# Altium PCB PCB1.PcbDoc
Units mm, origin at the board's own origin, x right, y up, seen from the top; angles counter-clockwise.
Board outline 23.37 x 32.64 mm, 2 copper layers (Top Layer, Bottom Layer); 11 components, 7 nets, 24 pads, 0 vias.
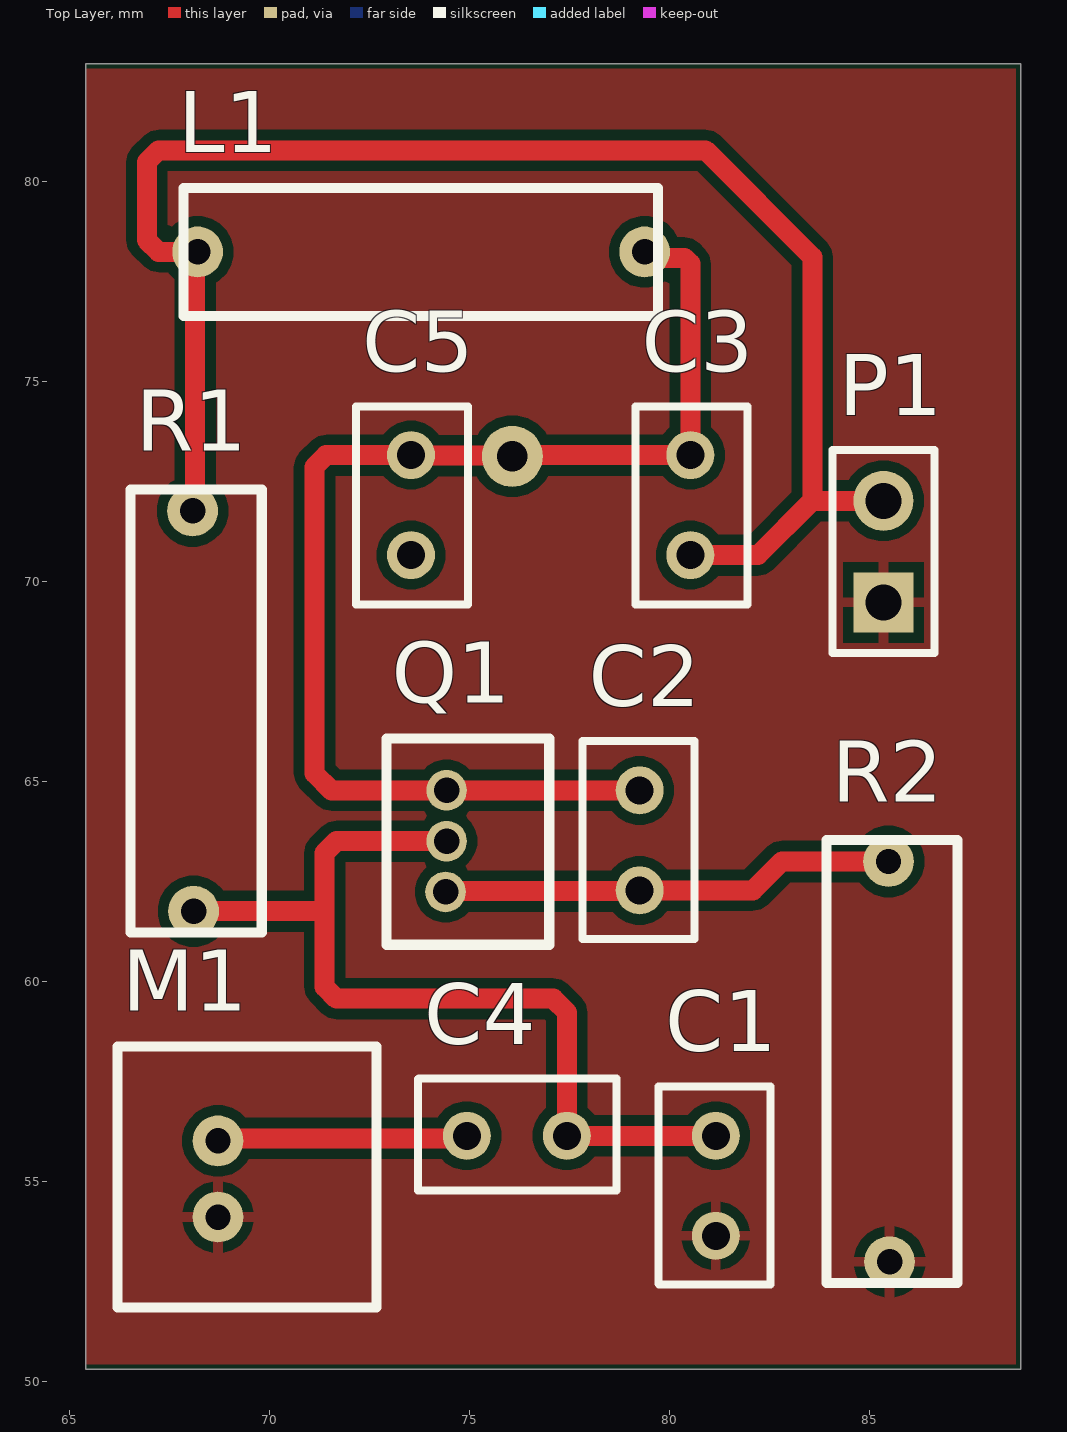
[diagram p0: Top Layer view]
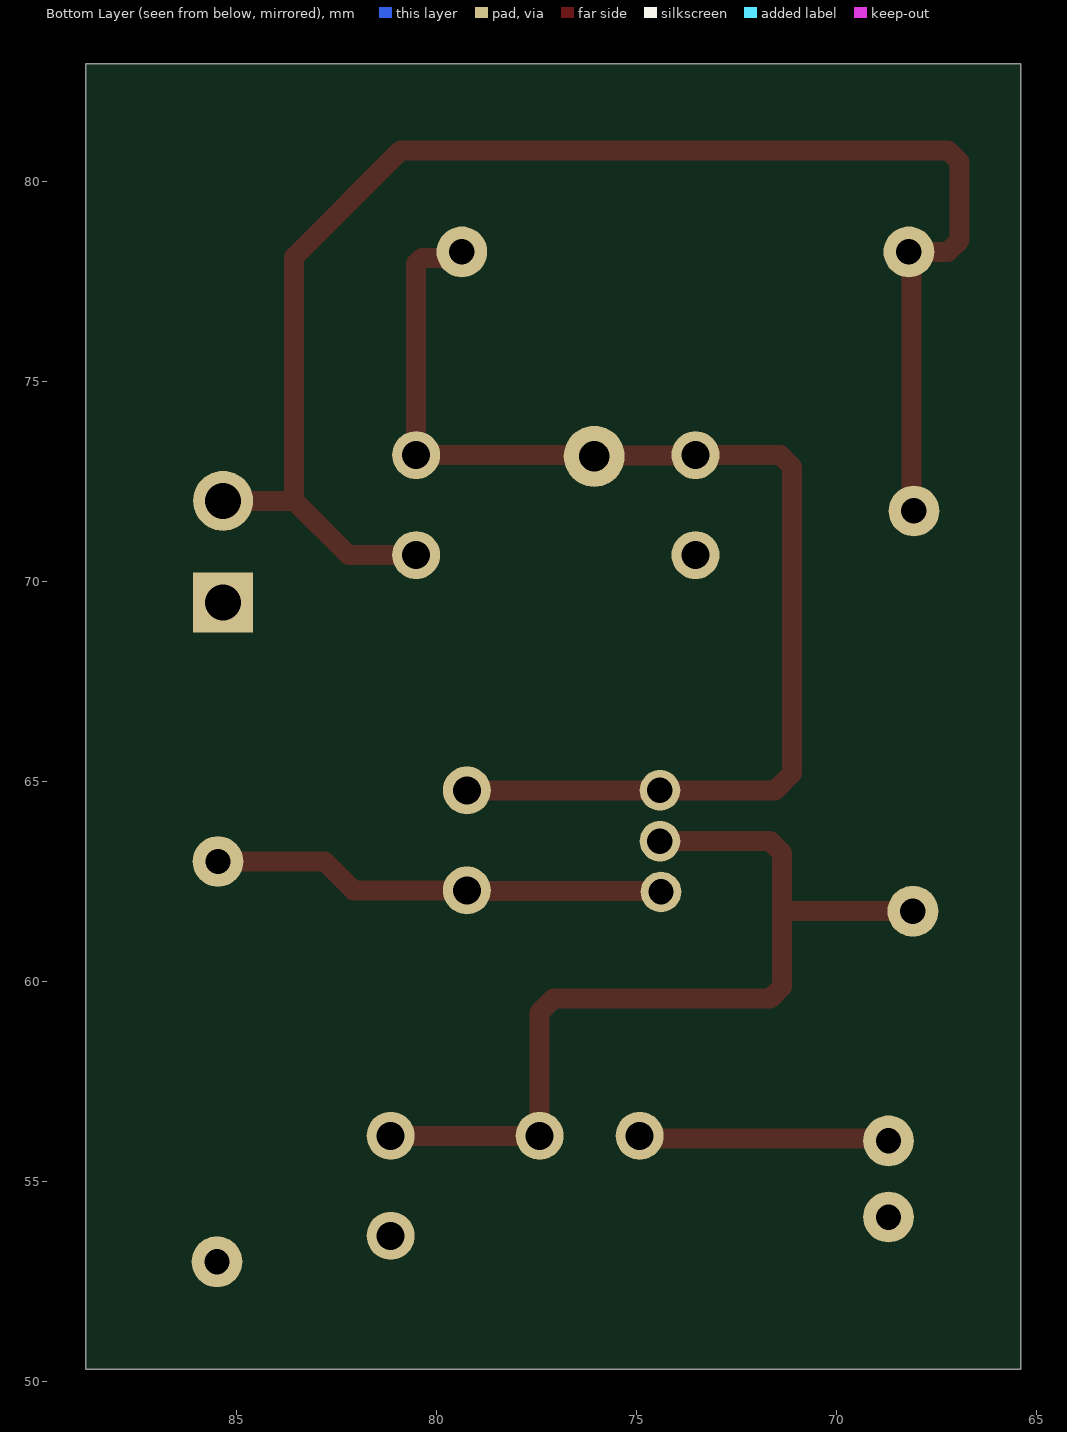
[diagram p1: Bottom Layer view, seen from below]
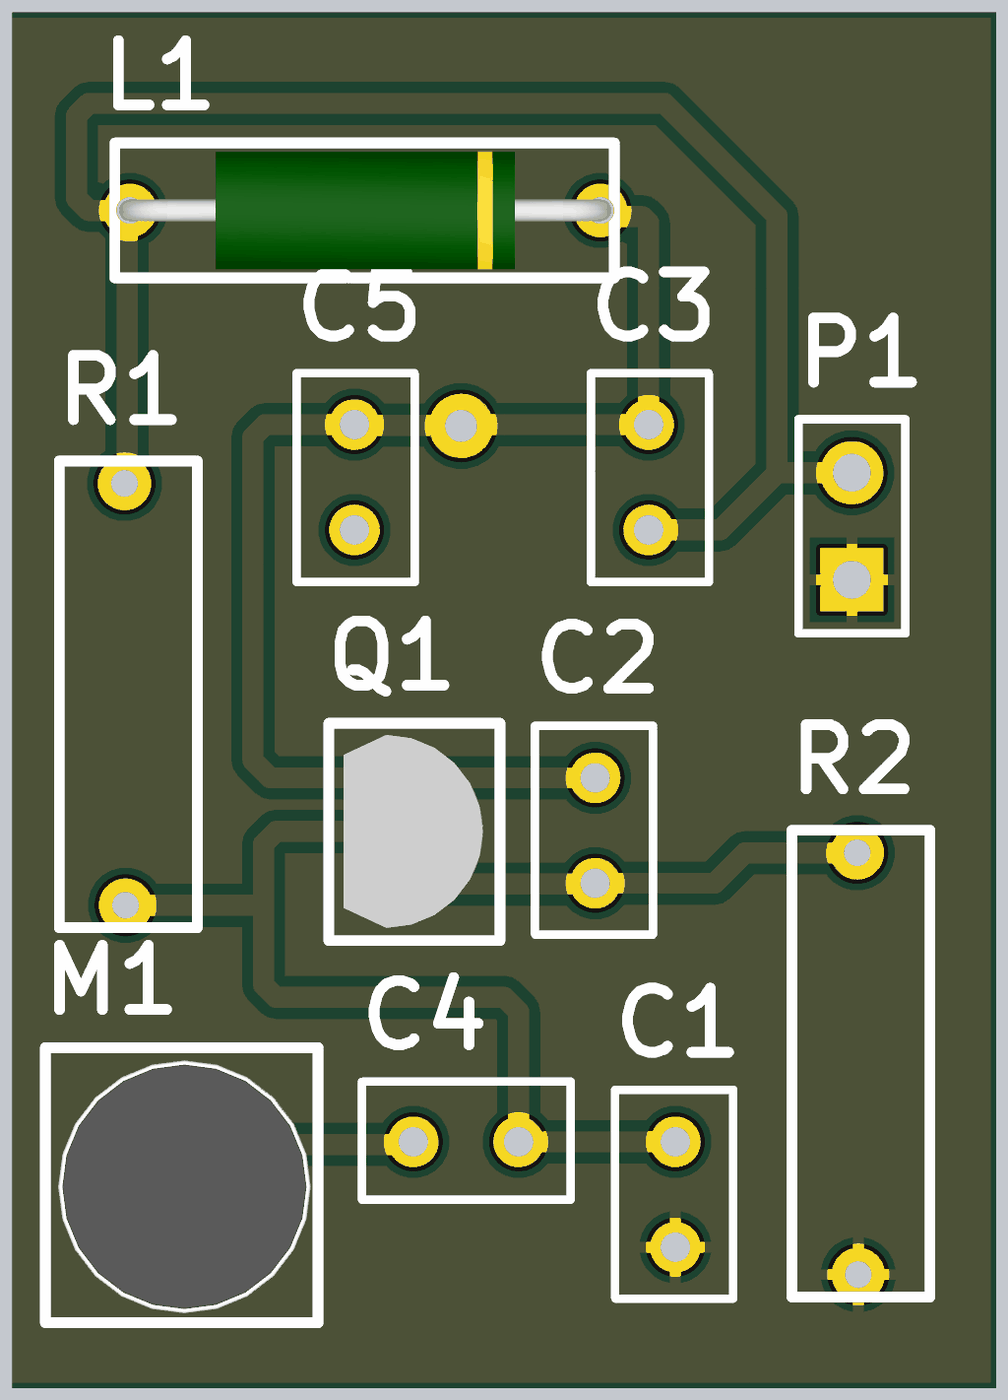
[diagram p2: 3D render of the assembled board from above, using the file's embedded part models]

## Layer stack, top to bottom
Top Solder: solder mask 0.0102, Solder Resist, Dk 3.5
Top Layer: signal copper 0.0356
Dielectric 1: dielectric 0.32, FR-4, Dk 4.8
Bottom Layer: signal copper 0.0356
Bottom Solder: solder mask 0.0102, Solder Resist, Dk 3.5

## Board outline
65.405,50.292 88.773,50.292 88.773,82.931 65.405,82.931

## Design rules (kind name [scope] priority, off if disabled: settings)
Clearance [All] p1: gap=0.254 ignorepadtopadclearanceinfootprint=FALSE except(0: Arc-Hole Track-Hole SMDPad-Hole THPad-Hole Via-Hole Fill-Hole Poly-Hole Region-Hole Text-Hole)
PolygonConnect [All] p1: connectstyle=Relief reliefconductorwidth=0.254 reliefentries=4 polygonreliefangle="90 Angle" airgapwidth=0.254
RoutingVias [All] p1: holewidth=0.711 width=1.27 viastyle="Through Hole" minholewidth=0.711 minwidth=1.27 maxholewidth=0.711 maxwidth=1.27
SolderMaskExpansion [All] p1: expansion=0.102 istentingtop=FALSE
Width [All] p1: maxlimit=1.5 minlimit=0.254 preferedwidth=0.254
30 further rules are at their usual default settings.

## Components (designator, comment, footprint, x,y, rotation, side; value= is the part's Value field where it differs from the comment)
C1 "1000p" Capacitor-2,5 81.153,53.634 r90 top
C2 "4.7p" Capacitor-2,5 79.248,62.27 r90 top
C3 "10p" Capacitor-2,5 80.518,73.152 r270 top
C4 "100n" Capacitor-2,5 74.93,56.134 r0 top
C5 "1p" Capacitor-2,5 73.533,73.152 r270 top
L1 "380n" Inductor1 79.4,78.232 r180 top
M1 "Mic" Mic 68.707,56.007 r270 top
P1 "Header 2" HDR1X2 85.344,69.469 r90 top
Q1 "BC547B" Transistor 74.041,65.761 r270 top
R1 "4.7k" Resistor 68.097,61.747 r90 top
R2 "270 Om" Resistor 85.496,52.984 r90 top

## Footprints (in the part's own frame and the unit in brackets; to place one, negate y for a bottom-side part, rotate by r counter-clockwise, add the part's x,y. Pads: shape width x height; smd on the part's side, far side on the other; paste and mask are expansions set on the pad)
Capacitor-2,5 [mm]
  round 1.2 hole 0.7: 1(0,0) 2(2.5,0)
  silkscreen extent -1.22,-1.37 3.73,1.43, body extent -1.07,-1.25 3.61,1.25, height 7.43
HDR1X2 [mm] "Connector; Header; 2 Position"
  rect 1.5x1.5 hole 0.9: 1(0,0)
  round 1.5 hole 0.9: 2(2.54,0)
  silkscreen extent -1.27,-1.27 3.81,1.27
Inductor1 [mil]
  round 50 hole 25: 1(1,0) 2(441,0)
  silkscreen extent -12,-63 455,63, body extent -9,-55 451,55, height 140
Mic [mm]
  round 1.27 hole 0.635: 1(0,0) 2(1.905,0)
  silkscreen extent -2.36,-2.51 4.17,3.96, body extent -2.06,-2.21 3.94,3.79, height 2.89
Resistor [mil]
  round 50 hole 25: 1(0,0) 2(394,1)
  silkscreen extent -21,-67 415,62, body extent -11,-44 406,46, height 98
Transistor [mil]
  round 40 hole 25: 1(39,15) 2(89,15) 3(139,14)
  silkscreen extent -12,-44 191,116, body extent -1,-30 179,100, height 280

## Part data
C1: library part Capaciitor, "Cap Ceramic 1uF 16V X7R 10% Radial 5mm 125°C Bulk", Case/Package=Radial, Manufacturer=TDK, Manufacturer Part Number=FK24X7R1C105KN000, Supplier Part Number 1=445-FK24X7R1C105KN000-ND, Category="Ceramic Capacitors", ComponentLink1Description=http://product.tdk.com/en/catalog/datasheets/leadmlcc_commercial_general_en.pdf?src-supplier=Avnet, ComponentLink1URL=http://product.tdk.com/en/catalog/datasheets/leadmlcc_commercial_general_en.pdf?src-supplier=Avnet, Pricing 1="1=0,44000, 10=0,30600, 50=0,21400, 100=0,18350, 500=0,13760, 1000=0,11620, 2500=0,11009, 5000=0,10397 (USD)", RoHS=Yes, RoHS Compliant=Yes, Stock 1=767, Supplier 1=DigiKey
C2: library part Capaciitor, "Capacitor Ceramic 4.7pF 50V C0G 0.25pF 2.5mm T/R", Capacitance=4.7pF, Case/Package=Radial, Manufacturer=TDK, Manufacturer Part Number=FA18C0G1H4R7CNU06, Max Operating Temperature=125°C, Min Operating Temperature=-55°C, Ratings=AEC-Q200, Supplier Part Number 1=445-180473-1-ND, Voltage Rating=50V, Category="Ceramic Capacitors", ComponentLink1Description=https://product.tdk.com/info/en/catalog/datasheets/leadmlcc_halogenfree_fa_en.pdf?src-supplier=Digi-Key, ComponentLink1URL=https://product.tdk.com/info/en/catalog/datasheets/leadmlcc_halogenfree_fa_en.pdf?src-supplier=Digi-Key, Height - Seated (Max)=0.217inch, Lead Pitch=0.098inch, Lead/Base Style="Formed Leads", Length=0.157inch, Mount="Through Hole", Packaging="Tape and Reel", Pricing 1="1=0,29000, 10=0,20100, 50=0,13420, 100=0,11410, 500=0,08052, 1000=0,07046 (USD)", RoHS=Yes, RoHS Compliant=Yes, Stock 1=3272, Supplier 1=Digi-Key, Width=0.098inch
C3: library part Capaciitor, "CAP CER 10PF 50V C0G RADIAL", Capacitance=10pF, Case/Package=Radial, Manufacturer=TDK, Manufacturer Part Number=FG18C0G1H100DNT06, Max Operating Temperature=125°C, Min Operating Temperature=-55°C, Supplier Part Number 1=445-173169-1-ND, Voltage Rating=50V, Category="Ceramic Capacitors", ComponentLink1Description=https://product.tdk.com/info/en/documents/chara_sheet/FG18C0G1H100DNT06.pdf?src-supplier=Digi-Key, ComponentLink1URL=https://product.tdk.com/info/en/documents/chara_sheet/FG18C0G1H100DNT06.pdf?src-supplier=Digi-Key, ComponentLink2Description=https://product.tdk.com/info/en/catalog/datasheets/leadmlcc_halogenfree_fg_en.pdf?src-supplier=Digi-Key, ComponentLink2URL=https://product.tdk.com/info/en/catalog/datasheets/leadmlcc_halogenfree_fg_en.pdf?src-supplier=Digi-Key, Height - Seated (Max)=0.217inch, Lead Pitch=0.098inch, Lead/Base Style="Formed Leads", Length=0.157inch, Mount="Through Hole", Packaging="Cut Tape", Pricing 1="1=0,28000, 10=0,19400, 50=0,11640, 100=0,09820, 500=0,06720, 1000=0,05946 (USD)", RoHS=Yes, RoHS Compliant=Yes, Stock 1=2402, Supplier 1=Digi-Key, Width=0.098inch
C4 C5: library part Capaciitor
L1: library part Inductor, "FIXED IND 380NH 2.5A 25.5 MOHM", Case/Package=Nonstandard, Current Rating=2.5A, DC Resistance (DCR)=25.5mR, Inductance=380nH, Manufacturer=Abracon, Manufacturer Part Number=AIAC-4125C-R380J-T, Max Operating Temperature=125°C, Min Operating Temperature=-40°C, Package Quantity=1000, Resistor Type=Wirewound, Self Resonant Frequency=500MHz, Supplier Part Number 1=535-12013-1-ND, Test Frequency=50MHz, Tolerance=5%, Category="Fixed Inductors", ComponentLink1Description=https://datasheet.ciiva.com/13311/aiac-4125c-218511-13311568.pdf?src-supplier=Mouser, ComponentLink1URL=https://datasheet.ciiva.com/13311/aiac-4125c-218511-13311568.pdf?src-supplier=Mouser, ComponentLink2Description=https://datasheet.ciiva.com/6708/aiac-4125c-6708566.pdf?src-supplier=Digi-Key, ComponentLink2URL=https://datasheet.ciiva.com/6708/aiac-4125c-6708566.pdf?src-supplier=Digi-Key, ComponentLink3Description=https://datasheet.ciiva.com/6708/aiac-4125c-6708567.pdf?src-supplier=Digi-Key, ComponentLink3URL=https://datasheet.ciiva.com/6708/aiac-4125c-6708567.pdf?src-supplier=Digi-Key, ComponentLink4Description=https://datasheet.ciiva.com/6690/aiac-4125c-6690967.pdf?src-supplier=Digi-Key, ComponentLink4URL=https://datasheet.ciiva.com/6690/aiac-4125c-6690967.pdf?src-supplier=Digi-Key, Core Material=Air, Height - Seated (Max)=0.197inch, Lead Pitch=9mm, Length=0.354inch, Max DC Current=2.5A, Mount="Surface Mount", Packaging="Tape and Reel", Pricing 1="1=1,01000, 10=0,93600, 25=0,86400, 50=0,72000, 100=0,67680, 250=0,60480, 500=0,51840 (USD)", Q Factor=100, RoHS=Yes, RoHS Compliant=Yes, Series=AIAC-4125C, Shielding=Unshielded, Stock 1=1374, Supplier 1=Digi-Key, Termination=SMD/SMT, Width=4.4mm
P1: "Header, 2-Pin", LatestRevisionDate=17-Jul-2002, LatestRevisionNote="Re-released for DXP Platform.", Publisher="Altium Limited"
Q1: library part Transistor, "ON SEMICONDUCTOR - BC547B - Bipolar (BJT) Single Transistor, General Purpose, NPN, 45 V, 300 MHz, 500 mW, 100 mA, 110 hFE", Case/Package=TO-92, Collector Base Voltage (VCBO)=50V, Collector Emitter Breakdown Voltage=45V, Collector Emitter Saturation Voltage=300mV, Current Rating=100mA, Emitter Base Voltage (VEBO)=6V, Frequency=300MHz, Manufacturer="ON Semiconductor / Fairchild", Max Operating Temperature=150°C, Max Power Dissipation=500mW, Min Operating Temperature=-65°C, Package Quantity=2000, Supplier Part Number 1=25AC6284, Voltage=40V, Category=BJTs, Collector Emitter Voltage (VCEO)=45V, ComponentLink1Description=https://datasheet.ciiva.com/17011/bc547-17011404.pdf?src-supplier=Future+Electronics, ComponentLink1URL=https://datasheet.ciiva.com/17011/bc547-17011404.pdf?src-supplier=Future+Electronics, ComponentLink2Description=https://datasheet.ciiva.com/985/bc546-547-548rev5-985523.pdf?src-supplier=Digi-Key, ComponentLink2URL=https://datasheet.ciiva.com/985/bc546-547-548rev5-985523.pdf?src-supplier=Digi-Key, ComponentLink3Description=https://datasheet.ciiva.com/972/bc546-972262.pdf?src-supplier=Digi-Key, ComponentLink3URL=https://datasheet.ciiva.com/972/bc546-972262.pdf?src-supplier=Digi-Key, ComponentLink4Description=https://datasheet.ciiva.com/1195/1868820-1195464.pdf?src-supplier=Element14, ComponentLink4URL=https://datasheet.ciiva.com/1195/1868820-1195464.pdf?src-supplier=Element14, ComponentLink5Description=https://datasheet.ciiva.com/25996/bc550-25996616.pdf?src-supplier=Avnet+Europe, ComponentLink5URL=https://datasheet.ciiva.com/25996/bc550-25996616.pdf?src-supplier=Avnet+Europe, ComponentLink6Description=https://datasheet.ciiva.com/11197/bc550-11197769.pdf?src-supplier=Avnet, ComponentLink6URL=https://datasheet.ciiva.com/11197/bc550-11197769.pdf?src-supplier=Avnet, ComponentLink7Description=https://datasheet.ciiva.com/16472/bc550-16472201.pdf?src-supplier=Avnet+Asia, ComponentLink7URL=https://datasheet.ciiva.com/16472/bc550-16472201.pdf?src-supplier=Avnet+Asia, Contact Plating=Copper,Tin,Silver, Element Configuration=Single, Gain Bandwidth Product=100MHz, Height=4.58mm, hFE Min=200, Lead Free="Lead Free", Length=4.58mm, Manufacturer Part Number=BC547B, Max Breakdown Voltage=45V, Max Collector Current=100mA, Max Frequency=300MHz, Mount="Through Hole", Number of Elements=1, Number of Pins=3, Packaging=Bulk, Polarity=NPN, Power Dissipation=500mW, Pricing 1="10000=0,05500 (USD)", Radiation Hardening=No, REACH SVHC="No SVHC", RoHS=Yes, Stock 1=7258, Supplier 1=Newark, Transition Frequency=300MHz, Voltage Rating (DC)=45V, Weight=0.007055oz, Width=3.86mm
R1: library part Resistor, "Res Metal Film 4.7K Ohm 2% 0.25W(1/4W) ±100ppm/C 0.01% Epoxy AXL Bulk", Case/Package=Conformal, Manufacturer="Vishay Dale", Manufacturer Part Number=RLR07C4701GRB14, Max Operating Temperature=150°C, Max Power Dissipation=250mW, Min Operating Temperature=-65°C, Package Quantity=100, Resistance=4.7kR, Resistor Type="Metal Film", Supplier Part Number 1=RLR07C4701GRB14-ND, Temperature Coefficient=100ppm/°C, Tolerance=2%, Category="Through-Hole Resistors", ComponentLink1Description=https://datasheet.ciiva.com/8820/erl-8820231.pdf?src-supplier=Avnet, ComponentLink1URL=https://datasheet.ciiva.com/8820/erl-8820231.pdf?src-supplier=Avnet, ComponentLink2Description=https://datasheet.ciiva.com/2772/erl-2772812.pdf?src-supplier=Digi-Key, ComponentLink2URL=https://datasheet.ciiva.com/2772/erl-2772812.pdf?src-supplier=Digi-Key, Construction=Cylindrical, Contact Plating=Tin,Lead, Diameter=2.29mm, Failure Rate=0.01%, Features="Moisture Resistant,Military,Weldable", Lead Free="Contains Lead", Length=7.62mm, Military Standard=MIL-PRF-39017, Mount="Through Hole", Number of Terminations=2, Packaging=Bulk, Pricing 1="1=2,75000, 10=2,43900, 25=2,26200, 50=2,12880, 100=1,86270, 250=1,59660, 500=1,33050, 1000=1,17971 (USD)", RoHS=No, RoHS Compliant=No, Series="Military, MIL-PRF-39017/01, RLR07", Stock 1=35, Supplier 1=Digi-Key, Termination=Axial, Width=2.29mm
R2: library part Resistor, "Res Carbon Film 270 Ohm 5% 0.125W(1/8W) -400ppm/C to 0ppm/C Conformal Coated AXL T/R", Case/Package=Conformal, Manufacturer="Stackpole Electronics", Manufacturer Part Number=CF18JT270R, Max Operating Temperature=155°C, Max Power Dissipation=125mW, Min Operating Temperature=-55°C, Package Quantity=1, Resistance=270R, Resistor Type="Carbon Film", Supplier Part Number 1=CF18JT270RCT-ND, Temperature Coefficient=-400ppm/°C, Tolerance=5%, Category="Through-Hole Resistors", ComponentLink1Description=http://components.arrow.com/part/dataview/31494781S5811587N1174?src-supplier=Arrow+Electronics, ComponentLink1URL=http://components.arrow.com/part/dataview/31494781S5811587N1174?src-supplier=Arrow+Electronics, ComponentLink2Description=https://www.seielect.com/Catalog/SEI-CF_CFM.pdf?src-supplier=Digi-Key, ComponentLink2URL=https://www.seielect.com/Catalog/SEI-CF_CFM.pdf?src-supplier=Digi-Key, ComponentLink3Description=https://www.seielect.com/catalog/SEI-Packaging.pdf?src-supplier=Digi-Key, ComponentLink3URL=https://www.seielect.com/catalog/SEI-Packaging.pdf?src-supplier=Digi-Key, ComponentLink4Description=https://www.verical.com/server-webapp/html/getDatasheet?partID=558178&src-supplier=Verical, ComponentLink4URL=https://www.verical.com/server-webapp/html/getDatasheet?partID=558178&src-supplier=Verical, ComponentLink5Description=https://www.seielect.com/catalog/SEI-CF_CFM.pdf?src-supplier=Avnet, ComponentLink5URL=https://www.seielect.com/catalog/SEI-CF_CFM.pdf?src-supplier=Avnet, Construction=Cylindrical, Contact Plating=Tin,Matte, Diameter=1.7mm, Features="Flame Retardant Coating", Length=3.3mm, Military Standard=Not, Mount="Through Hole,Axial", Number of Terminations=2, Packaging="Tape and Reel", Pricing 1="1=0,10000, 10=0,04500, 25=0,03240, 50=0,02480, 100=0,01830, 250=0,01396, 500=0,01116, 1000=0,00822 (USD)", Radiation Hardening=No, RoHS=Yes, RoHS Compliant=Yes, Series=CF, Stock 1=379, Supplier 1=Digi-Key, Termination=Axial

## Free pads (board coordinates)
  round 1.524 hole 0.762: 1(76.065,73.12)

## Nets (pads, with @x,y where several pads share a name; then routed paths per layer and width w, separated by ;. In a path a pad name is that pad's centre, name@x,y a point inside that pad or via, vN(x,y) a via of type N, cw(c..) or ccw(c..) an arc to the next point about the centre after c; other vN are vias at no path point)
+5: C3.2 L1.2 P1.2 R1.2 | length 39.6
  Top Layer w0.5: R1.2@67.945,71.882 R1.2 68.135,71.819 68.135,78.168 L1.2 67.222,78.232 66.929,78.525 66.929,80.479 67.222,80.772 80.899,80.772 83.566,78.105 83.566,72.009 ; C3.2@80.581,70.715 C3.2 82.209,70.652 83.566,72.009 ; P1.2@85.281,71.945 P1.2 83.566,72.009
GND: C1.1 M1.2 P1.1 R2.1
NetC1_2: C1.2 C4.2 Q1.2 R1.1 | length 23.2
  Top Layer w0.5: R1.1@68.245,61.895 R1.1 71.272,61.747 71.374,61.849 ; Q1.2 71.667,63.5 71.374,63.207 71.374,61.849 ; C1.2 C4.2 77.43,59.222 77.089,59.563 71.667,59.563 71.374,59.856 71.374,61.849
NetC2_1: C2.1 Q1.3 R2.2 | length 11.4
  Top Layer w0.5: Q1.3 74.417,62.25 79.228,62.25 C2.1 82.082,62.27 82.804,62.992 R2.2
NetC2_2: C2.2 C3.1 C5.1 L1.1 pad.1 Q1.1 | length 31.6
  Top Layer w0.5: C2.2 Q1.1 71.54,64.77 71.12,65.19 71.12,72.859 71.413,73.152 C5.1 73.549,73.136 76.049,73.136 pad.1 76.073,73.152 C3.1 80.518,77.939 80.372,78.085 79.522,78.085 L1.1
NetC4_1: C4.1 M1.1 | length 6.3
  Top Layer w0.5: M1.1 68.77,56.07 74.867,56.07 C4.1
NetC5_2: C5.2

## Polygon pours and split planes (outlines as drawn)
GND on Top Layer "GND_L01_P001" (solid, pour order 1): 65.405,82.804 88.646,82.804 88.646,50.419 65.405,50.419